# EAGLE board sheet1 (EAGLE 7.2.0)
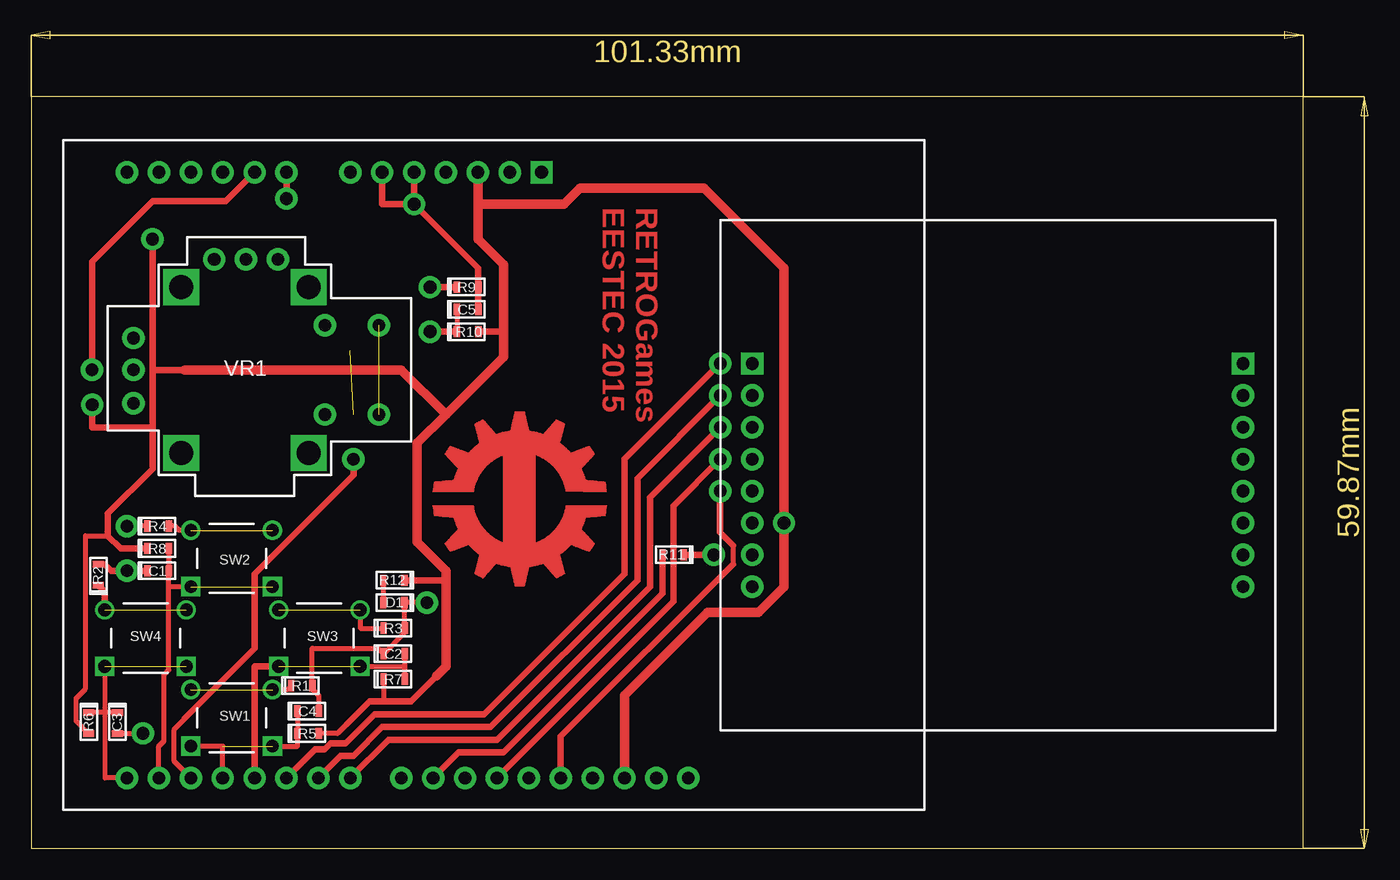
[diagram p0: board, top side]
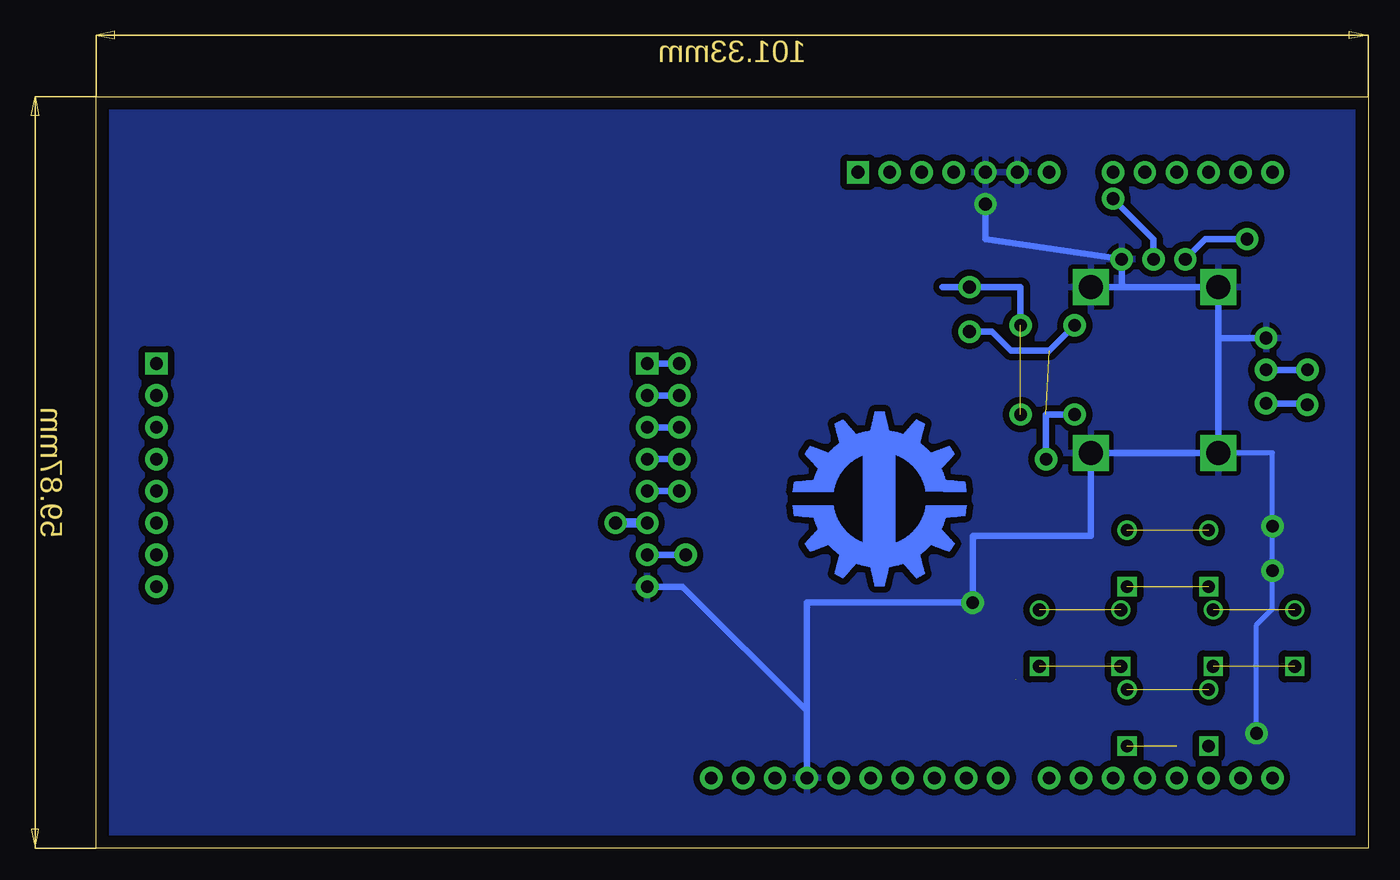
[diagram p1: board, bottom side, seen from below]

Size 101.33 x 59.87 mm. Coordinates in mm from the lower left corner, seen from the top.
Outline: 0,0 101.33,0 101.33,59.87 0,59.87 0,0
Copper layers (1*16): Top 0.035mm / dielectric 1.5mm / Bottom 0.035mm
Design rules "default *": minimum track width 10mil, minimum drill 24mil, track to track 8mil, track to pad 8mil, pad to pad 8mil, via to via 8mil, smd to smd 8mil, copper to edge 40mil, drill to drill 8mil, minimum pad ring 10mil, minimum via ring 8mil, stop-mask expansion 4mil, vias tented up to drill 0mil, thermal gap 15mil

## Footprints (pad centres in the part's own frame; a part is rotated, then mirrored left to right if it is on the bottom)
0603_SILKSCREEN = smd 0.508 x 0.889: 0 -1.041,0; 1 0.648,0
ARDUINO__NOKIA_5110_DISP = drill 1.016 pad 1.778: CE 6.35,0; CE1 6.35,39.1; CLK -1.27,0; CLK1 -1.27,39.1; DC 3.81,0; DC1 3.81,39.1; DIN 1.27,0; DIN1 1.27,39.1; GND -8.89,0; GND1 -8.89,39.1; LIGHT -6.35,0; LIGHT1 -6.35,39.1; VCC -3.81,0; VCC1 -3.81,39.1 | drill 1.016 pad 1.778 square: RST 8.89,0; RST1 8.89,39.1
SWITCH_REGULAR = drill 1.016 square: P$1 0,0; P$2 6.5,0 | drill 1.016: P$3 6.5,4.5; P$4 0,4.5
ARDUINO_UNO_PINOUT = drill 1.016 pad 1.778: 3V3 -27.94,0; 5V -25.4,0; ADC0 -12.7,0; ADC1 -10.16,0; ADC2 -7.62,0; ADC3 -5.08,0; ADC4 -2.54,0; ADC5 0,0; AREF -39.624,48.26; GND -22.86,0; GND@2 -20.32,0; GND@3 -37.084,48.26; PB0 -21.844,48.26; PB1 -24.384,48.26; PB2 -26.924,48.26; PB3 -29.464,48.26; PB4 -32.004,48.26; PB5 -34.544,48.26; PC4 -42.164,48.26; PC5 -44.704,48.26; PD0 0,48.26; PD1 -2.54,48.26; PD2 -5.08,48.26; PD3 -7.62,48.26; PD4 -10.16,48.26; PD5 -12.7,48.26; PD6 -15.24,48.26; PD7 -17.78,48.26; RESET -30.48,0; VIN -17.78,0 | drill 1.016 pad 1.778 square: IOREF -33.02,0
PLAYSTATION_JOYSTICK = drill 1.016 pad 1.778: GND 9.398,-2.794; GND@2 -2.108,-9.068; GND@3 -10.16,-3.81; GND@4 -10.16,3.302; SW -5.842,3.302; SW@2 -5.842,-3.81; VCC 9.398,2.413; VCC@2 2.972,-9.068; X 0.432,-9.068; Y 9.398,-0.254 | drill 1.905 square: GND@5 -4.572,6.35; GND@6 5.588,6.35; GND@7 5.588,-6.858; GND@8 -4.572,-6.858

## Placement (x,y rotation side)
C1  100nF  [0603_SILKSCREEN]  9.91,22.1 180 top
C2  100nF  [0603_SILKSCREEN]  28.7,15.49 180 top
C3  100nF  [0603_SILKSCREEN]  6.86,10.16 90 top
C4  100nF  [0603_SILKSCREEN]  21.84,10.92 180 top
C5  100nF  [0603_SILKSCREEN]  34.54,42.93 180 top
D1  [0603_SILKSCREEN]  29.06,19.56 0 top
LCD1  [ARDUINO__NOKIA_5110_DISP]  96.52,29.72 90 top
R1  100  [0603_SILKSCREEN]  21.34,12.95 180 top
R2  100  [0603_SILKSCREEN]  5.33,21.59 270 top
R3  100  [0603_SILKSCREEN]  28.7,17.53 180 top
R4  100  [0603_SILKSCREEN]  9.91,25.65 180 top
R5  10k  [0603_SILKSCREEN]  21.84,9.14 180 top
R6  10k  [0603_SILKSCREEN]  4.57,10.16 90 top
R7  10k  [0603_SILKSCREEN]  28.7,13.46 180 top
R8  10k  [0603_SILKSCREEN]  9.91,23.88 180 top
R9  100  [0603_SILKSCREEN]  34.54,44.7 180 top
R10  10k  [0603_SILKSCREEN]  34.54,41.15 180 top
R11  200  [0603_SILKSCREEN]  51.31,23.37 0 top
R12  470  [0603_SILKSCREEN]  29.06,21.34 0 top
SW1  [SWITCH_REGULAR]  12.7,8.13 0 top
SW2  [SWITCH_REGULAR]  12.7,20.83 0 top
SW3  [SWITCH_REGULAR]  19.68,14.48 0 top
SW4  [SWITCH_REGULAR]  5.84,14.48 0 top
U1  [ARDUINO_UNO_PINOUT]  7.62,53.85 180 top
VR1  [PLAYSTATION_JOYSTICK]  17.53,37.85 180 top

## Library data of the parts
C1-C5 D1 LCD1 R1-R12 SW1-SW4 U1 VR1 = usevolt

## Nets
+3.3V: LCD1.VCC1 R5.0 R6.0 R7.1 R8.1 R10.0 R12.1 U1.3V3 U1.AREF VR1.VCC VR1.VCC@2
B1: C4.1 R5.1 SW1.P$1 SW1.P$2 U1.PD3
B2: C3.1 R6.1 SW4.P$1 SW4.P$2 U1.PD0
B3: C1.0 R8.0 SW2.P$1 SW2.P$2 U1.PD1
B4: C2.0 R7.0 SW3.P$1 SW3.P$2 U1.PD4
GND: C1.1 C2.1 C3.0 C4.0 C5.0 D1.1 LCD1.GND1 R1.0 R2.0 R3.0 R4.1 R9.0 U1.GND U1.GND@2 U1.GND@3 VR1.GND VR1.GND@2 VR1.GND@5 VR1.GND@6 VR1.GND@7 VR1.GND@8
N$1: LCD1.LIGHT1 R11.1
N$2: R2.1 SW4.P$3 SW4.P$4
N$3: R1.1 SW1.P$3 SW1.P$4
N$4: R11.0 U1.PB1
N$5: LCD1.DIN1 U1.PB3
N$6: R4.0 SW2.P$3 SW2.P$4
N$7: R3.1 SW3.P$3 SW3.P$4
N$8: LCD1.CLK1 U1.PB5
N$9: LCD1.RST1 U1.PD5
N$10: LCD1.CE1 U1.PD6
N$11: LCD1.DC1 U1.PD7
N$12: R9.1 VR1.GND@3 VR1.GND@4
N$13: D1.0 R12.0
SW: C5.1 R10.1 U1.PD2 VR1.SW VR1.SW@2
X: U1.ADC0 VR1.X
Y: U1.ADC1 VR1.Y

## Tracks (layer width: path | path; a pad name or v marks a point on that pad's centre or on a via)
+3.3V  (via drill 1.02 pad 1.78)  (1 unrouted)
  Top 0.381: 24.38,9.14 R5.0 | R6.0 3.56,10.14 3.56,11.94 4.32,12.7 4.32,24.89 6.1,24.89
  Top 0.406: 25.15,9.91 24.38,9.14 | 28.04,13.45 28.04,11.68
  Top 0.508: 25.15,9.91 26.92,11.68 28.04,11.68 30.23,11.68 32.26,13.72 | v9.65,48.51 9.65,38.1 | 9.65,38.1 9.65,33.53 | 9.65,33.53 4.83,33.53 v4.85,35.33 | R12.1 33.02,21.34 | 9.65,33.53 9.65,30.23 6.1,26.67 6.1,24.89 7.11,23.88 R8.1 | 9.65,38.1 12.19,38.1 | R10.0 37.59,41.15
  Top 0.762: 32.26,13.72 33.02,14.48 33.02,21.34 33.02,22.1 30.73,24.38 30.73,32.26 33.02,34.54 | 33.02,34.54 37.59,39.12 37.59,41.15 37.59,46.48 35.56,48.51 35.56,51.31 | U1.3V3 35.56,51.31 | U1.AREF 47.24,12.19 53.85,18.8 57.91,18.8 59.94,20.83 v59.94,25.91 59.94,46.23 53.59,52.58 43.69,52.58 42.42,51.31 35.56,51.31 | 12.19,38.1 29.46,38.1 33.02,34.54
  Bottom 0.508: VR1.VCC 4.85,35.43 v4.85,35.33 | VR1.VCC@2 12.95,48.51 v9.65,48.51
  Bottom 0.762: v59.94,25.91 LCD1.VCC1
B1  (1 unrouted)
  Top 0.406: U1.PD3 15.24,8.13 SW1.P$1 | C4.1 R5.1 21.2,8.13 SW1.P$2
B2  (1 unrouted)
  Top 0.381: C3.1 5.84,10.81 | 5.84,10.81 R6.1 | 5.84,13.11 5.84,10.81 | 5.84,10.81 5.84,5.59
  Top 0.406: U1.PD0 5.84,5.59 | SW4.P$1 5.84,13.11
B3  (1 unrouted)
  Top 0.406: R8.0 C1.0 10.95,20.83 | SW2.P$1 10.95,20.83 | U1.PD1 10.16,8.13 10.57,8.53 10.57,13.82 10.95,14.2 10.95,20.83
B4  (1 unrouted)
  Top 0.406: SW3.P$2 29.74,14.48 | 29.74,14.48 R7.0 | C2.0 29.74,14.48
  Top 0.508: U1.PD4 17.78,14.48 SW3.P$1
GND  (via drill 1.02 pad 1.78)
  Top 0.381: C4.0 22.88,12.17 22.38,12.68 R1.0 22.38,15.93 27.62,15.93 C2.1 29.74,17.18 R3.0 29.74,19.52 D1.1 v31.5,19.56 | R4.1 v7.62,25.65 | v8.89,9.14 8.87,9.12 C3.0
  Top 0.508: v30.48,51.31 U1.GND | U1.GND@2 27.94,51.31 v30.48,51.31 | C5.0 R9.0 35.59,46.2 v30.48,51.31 | C1.1 v7.62,22.1 6.35,22.1 5.84,22.61 5.36,22.61 R2.0
  Bottom 0.381: VR1.GND@6 7.62,31.5 v7.62,25.65 v7.62,22.1 7.62,19.05 8.89,17.78 v8.89,9.14
  Bottom 0.508: U1.GND@3 44.7,10.92 | 44.7,10.92 54.61,20.83 LCD1.GND1 | 44.7,10.92 44.7,19.56 v31.5,19.56 31.5,24.89 22.1,24.89 VR1.GND@5 VR1.GND@6 11.94,40.64 | VR1.GND 11.94,40.64 | 11.94,40.64 VR1.GND@7 19.63,44.7 | 19.63,44.7 VR1.GND@8 | 19.63,44.7 VR1.GND@2 30.48,48.51 v30.48,51.31
  pour Bottom (isolate 0.508): 0,0 0.25,59.69 101.6,59.69 101.35,0
N$1  (via drill 1.02 pad 1.78)
  Top 0.508: v54.36,23.37 R11.1
  Bottom 0.508: LCD1.LIGHT1 v54.36,23.37
N$2  (1 unrouted)
  Top 0.508: SW4.P$4 5.84,20.43 R2.1
N$3  (1 unrouted)
  Top 0.406: R1.1 20.36,12.63 SW1.P$3
N$4
  Top 0.508: U1.PB1 34.04,7.62 37.59,7.62 50.27,20.3 R11.0
N$5  (via drill 1.02 pad 1.78)
  Top 0.508: U1.PB3 51.16,19.66 51.16,27.28 v54.86,30.99
  Bottom 0.508: v54.86,30.99 LCD1.DIN1
N$6  (1 unrouted)
  Top 0.406: SW2.P$4 11.76,25.33 11.43,25.65 R4.0
N$7  (1 unrouted)
  Top 0.406: SW3.P$3 26.18,17.53 R3.1
N$8  (via drill 1.02 pad 1.78)
  Top 0.381: 55.88,24.13 55.88,22.61
  Top 0.508: v54.86,28.45 54.86,25.15 55.88,24.13 | 55.88,22.61 42.16,8.89 U1.PB5
  Bottom 0.508: LCD1.CLK1 v54.86,28.45
N$9  (via drill 1.02 pad 1.78)
  Top 0.508: U1.PD5 22.61,7.87 23.37,7.87 23.82,8.33 25.02,8.33 27.36,10.67 36.07,10.67 47.24,21.84 47.24,30.99 v54.86,38.61
  Bottom 0.508: LCD1.RST1 v54.86,38.61
N$10  (via drill 1.02 pad 1.78)
  Top 0.508: U1.PD6 24.64,7.37 25.65,7.37 27.94,9.65 36.58,9.65 48.26,21.34 48.26,29.46 v54.86,36.07
  Bottom 0.508: v54.86,36.07 LCD1.CE1
N$11  (via drill 1.02 pad 1.78)
  Top 0.508: v54.86,33.53 49.28,27.94 49.28,20.83 37.08,8.64 28.45,8.64 U1.PD7
  Bottom 0.508: LCD1.DC1 v54.86,33.53
N$12  (via drill 1.02 pad 1.78)  (1 unrouted)
  Top 0.508: R9.1 v31.75,44.7
  Bottom 0.508: VR1.GND@3 27.69,44.7 v31.75,44.7 R9.1
N$13
  Top 0.406: R12.0 D1.0
SW  (via drill 1.02 pad 1.78)  (1 unrouted)
  Top 0.381: U1.PD2 11.38,6.91 11.38,9.47 12.22,10.31 12.22,10.34
  Top 0.406: C5.1 R10.1
  Top 0.508: 12.22,10.34 17.78,15.9 17.78,21.84 25.65,29.72 v25.65,30.99 | R10.1 v31.75,41.15
  Bottom 0.508: v25.65,30.99 25.65,34.54 VR1.SW | v31.75,41.15 29.97,41.15 28.45,39.62 25.4,39.62 VR1.SW@2
X  (via drill 1.02 pad 1.78)
  Top 0.508: v20.32,51.74 U1.ADC0
  Bottom 0.508: VR1.X 17.09,48.51 v20.32,51.74
Y  (via drill 1.02 pad 1.78)
  Top 0.508: U1.ADC1 15.49,51.56 9.65,51.56 4.83,46.74 v4.83,38.1
  Bottom 0.508: VR1.Y v4.83,38.1
(copper drawn outside any net)
  shapes: Bottom area x1222, Top area x1222

## Text on the board
Top: RETROGames / EESTEC 2015